# Altium PCB Sensor_LoRa_Flower_Watchdog.PCBDOC (part 2 of 2)
Units mil, origin at the board's own origin, x right, y up, seen from the top; angles counter-clockwise.
Board outline 1299.21 x 7913.39 mil, 2 copper layers (Top, Bot), stack 63.824 mil thick; 64 components, 53 nets, 204 pads, 152 vias.
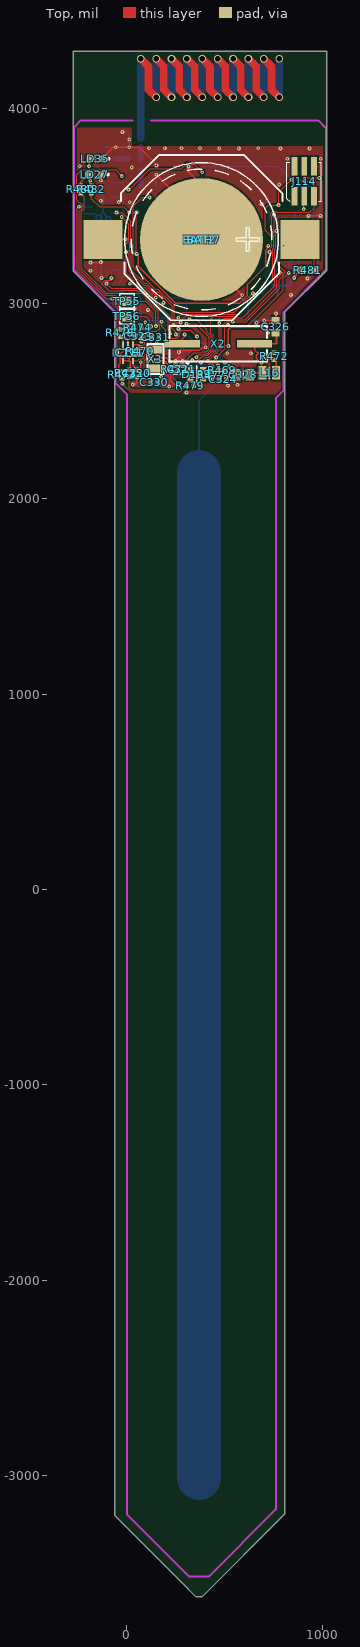
[diagram p0: Top view]

## Via types
v1: diameter 19.68, hole 7.87, Top to Bot, tented both sides, 133 vias
v2: diameter 39.37, hole 27.56, Top to Bot, tented both sides, 19 vias

## Nets (pads, with @x,y where several pads share a name; then routed paths per layer and width w, separated by ;. In a path a pad name is that pad's centre, name@x,y a point inside that pad or via, vN(x,y) a via of type N, cw(c..) or ccw(c..) an arc to the next point about the centre after c; other vN are vias at no path point) (continued)
P3V0: (continued)
  Bot w5: T40.2 -27.95,3545.28 -19.68,3553.54 ; R468.1 -26.57,3118.5 R467.1 -9.45,3138.19 0,3147.64 0,3198.82 R483.1@-20.08,3218.9 ; v1(-26.57,3442.01) -21.73,3442.01 -19.68,3439.96 -19.68,3553.54 ; R483.1 R483.1@-20.08,3218.9 ; v1(-5.47,3262.82) -8.44,3262.82 -20.08,3251.18 R483.1@-20.08,3218.9 ; v1(7.87,3582.68) 7.68,3582.87 R489.2 -19.68,3553.54 ; C322.2 231.46,2768.09 225.18,2768.09 218.9,2761.81 IC112.4 178.15,2761.81 171.87,2755.53 171.87,2684.89 167.48,2680.49 33.31,2680.49 28.92,2684.89 28.92,2701.77 27.93,2702.76 IC112.18 -16.73,2702.76 -46.26,2732.28 -46.26,2964.57 -156.5,3074.8 IC109.8 -156.5,3224.41 -147.64,3233.27 -34.45,3233.27 R483.1@-20.08,3218.9 ; IC113.13 v1(385.83,3671.26) 385.83,3692.01 C329.2 773.43,3700.79 v1(841.54,3632.68) ; R488.1@711.02,3136.03 711.02,3154.58 728.74,3172.3 IC114.8 728.74,3261.22 v1(730.32,3262.8) ; R488.1 711.14,3130.59 R466.2 ; R487.2 v1(776.57,3502.95) ; R476.1 862.99,3670.08 841.54,3648.62 v1(841.54,3632.68) ; TP53.1 873.82,3600.39 v1(841.54,3632.68)
  Bot w15: T39.2 770.08,3071.65 R466.2 828.74,3090.55 839.47,3101.28 839.47,3115.26 854.16,3129.95 v1(856.31,3129.95)
PROBE: D139.4 R469.2 | length 5863.3
  Top w7.87: D139.4 396.64,2662.4 431.09,2696.85 452.76,2696.85 v1(467.52,2682.09) R469.2@467.52,2652.56
  Bot w7.87: 369.09,2135.83 369.09,2502.77 460.83,2594.5 460.83,2601.9 467.52,2608.59 v1(467.52,2682.09)
  Bot w226.77: 369.09,-3011.81 369.09,2135.83
PROG_MISO: J114.1
RESETn: IC112.29 J114.5 R476.2 | length 1617.2
  Top w5: v1(274.52,2902.42) 266.45,2902.42 307.99,2943.96 571.83,2943.96 747.66,3119.79 747.66,3279.86 750.77,3282.97 750.77,3346.67 737.91,3359.53 737.91,3382.6 742.45,3387.14 742.45,3440.48 735.6,3447.33 735.6,3462.11 746.05,3472.57 760.83,3472.57 768.06,3465.33 935.81,3465.33 957.68,3487.2 J114.5 957.68,3604.33 939.11,3622.89 911.75,3622.89 v1(907.68,3626.97)
  Bot w5: IC112.29 105.19,2853.47 105.19,2889.23 117.66,2901.7 156.96,2901.7 169.98,2888.68 184.35,2888.68 194.51,2898.84 194.51,2903.58 205,2914.07 239.19,2914.07 250.85,2902.42 v1(274.52,2902.42) ; R476.2 887.99,3626.97 v1(907.68,3626.97)
SCL1: IC109.6 IC112.6 R468.2 | length 821.7
  Top w5: v1(-105.21,3101.4) -81.42,3077.6 52.9,3077.6 58.9,3071.6 87.18,3071.6 119.58,3039.2 119.58,3030.51 221.61,2928.48 221.61,2880.13 250.98,2850.76 v1(250.98,2841.32)
  Bot w5: IC109.6 -100.86,3168.77 -100.86,3116.96 R468.2@-85.29,3101.4 ; v1(-105.21,3101.4) R468.2@-85.29,3101.4 ; IC112.6 196.85,2723.89 258.41,2723.89 263.1,2728.58 263.1,2730.23 266.03,2733.16 273.14,2733.16 283.59,2743.62 283.59,2758.4 271.52,2770.47 269.69,2770.47 263.1,2777.06 263.1,2829.2 v1(250.98,2841.32) ; R468.2@-85.29,3101.4 -80.73,3101.4 R468.2@-85.27,3101.38
SDA1: IC109.5 IC112.3 R467.2 | length 755.2
  Top w5: 221.46,2854.51 211.61,2864.35 211.61,2924.34 109.58,3026.37 109.58,3035.06 83.04,3061.6 53.34,3061.6 48.34,3066.6 -16.54,3066.6 -18.23,3064.92 -93.1,3064.92 -112.24,3084.06 -112.4,3084.06 -122.56,3094.21 -122.56,3108.58 -112.4,3118.74 -89.95,3118.74 ; -89.95,3118.74 -80.08,3118.74 -78.74,3120.08 v1(-78.74,3129.95) -89.95,3118.74
  Bot w5: v1(-78.74,3129.95) -78.74,3172.24 IC109.5 -28.54,3173.23 R467.2 ; IC112.3 213.83,2781.5 222.44,2790.11 222.44,2843.53 v1(221.46,2844.51)
SENS_ENn: IC112.26 R466.1 T39.1 | length 824.9
  Top w5: v1(262.56,2926.61) 262.56,2929.17 288.36,2954.96 548.47,2954.96 v1(644.69,3051.18)
  Bot w5: IC112.26 51.18,2888.15 58.23,2895.2 60.32,2895.2 90.19,2925.07 251.34,2925.07 262.56,2936.29 v1(262.56,2926.61) ; v1(644.69,3051.18) 687.4,3051.18 T39.1 695.28,3071.65 R466.1
SENS_OUT: C323.2 IC112.25 R474.1 | length 137.3
  Top w5: v1(20.28,2845.11) 20.28,2847.1 17.69,2844.51 19.69,2842.52 31.3,2842.52 42.13,2831.69 57.07,2846.63 ; 57.07,2846.65 61.46,2851.05 61.46,2863.63 66.93,2869.09 R474.1@79.53,2869.09
  Bot w5: v1@14.79,2849.43 v1@15.79,2848.43 ; v1@15.79,2848.43 v1@18.7,2845.52 ; v1@15.79,2848.43 13.78,2848.43 17.69,2844.51 v1@18.7,2845.52 ; v1@18.7,2845.52 v1@19.28,2846.1 ; v1@18.7,2845.52 v1@19.11,2845.11 ; v1@19.11,2845.11 19.71,2844.51 23.62,2848.43 19.09,2852.95 19.09,2846.29 v1@19.28,2846.1 ; v1@19.11,2845.11 v1(20.28,2845.11) ; v1@19.28,2846.1 20.28,2847.1 v1(20.28,2845.11) ; v1@19.28,2846.1 v1(20.28,2845.11)
VCC: C319.2 C320.1 IC110.14 IC111.5 T39.3 | length 1281.5
  Top w5: IC111.5 52.44,2705.71 64.05,2717.32 84.21,2717.32 88.6,2721.72 88.6,2793.31 91.16,2795.87 91.16,2810.72 96.48,2816.03 96.48,2846.67 ; v1@90.36,2897.25 93.5,2900.39 v1(93.5,2903.57) ; v1@93.5,2897.25 93.5,2890.55 102.61,2881.44 102.61,2866.52 96.46,2860.36 96.46,2846.69 ; v1(177.17,2906.03) 177.17,2883.2 199.11,2861.25 199.11,2835.37 213.99,2820.49 254.69,2820.49 268.33,2834.13 268.33,2849.37 280.2,2861.24 327.81,2861.24 v1@355.71,2833.35
  Top w7.87: IC111.5 31.5,2685.04 37.4,2679.13 37.4,2672.24 C320.1 C320.1@51.81,2659.45 ; v1@355.71,2833.35 v1(359.33,2829.72) ; v1(519.09,2781.57) 519.09,2864.5 531.94,2877.34 682.46,2877.34 v1(688.78,2883.66)
  Bot w5: v1(93.5,2903.57) 102.14,2912.2 170.99,2912.2 v1(177.17,2906.03)
  Bot w7.87: v1(359.33,2829.72) 359.33,2826.1 368.03,2817.4 368.03,2808.31 381.94,2794.39 462.63,2794.39 475.45,2781.57 v1(519.09,2781.57) ; IC110.14 v1(688.78,2883.66) 698.15,2893.03 729.65,2893.03 C319.2 730.32,2950.39 T39.3
pads on no net: IC110.8 IC110.9 IC110.10 IC110.11 IC110.12 IC110.13 IC113.7 IC113.11 IC113.12 IC113.15 IC113.16

## Polygon pours and split planes (outlines as drawn)
GND on Top "Top-GND" (solid, remove dead copper, pour order 2): -63.98,2534.45 806.77,2534.45 806.77,2952.76 1023.62,3169.6 1023.62,3804.13 24.61,3804.13 24.61,3899.41 -273.82,3899.41 -275.59,3897.64 -273.76,3895.81 -273.76,3164.37 -63.98,2954.58
GND on Bot "Bot-GND" (solid, remove dead copper, pour order 0): 0,2534.45 0,-3198.82 319.88,-3518.7 418.31,-3518.7 762.8,-3174.21 762.8,2514.76 1023.62,2775.59 1023.62,3804.13 24.61,3804.13 24.61,3899.41 -275.59,3897.64 -275.59,2810.04

## Keep-outs
KeepOutLayer:
  lines w10: 29.53,3937.01 -236.22,3937.01 -270.67,3902.56 -270.67,3169.29 -59.06,2957.68 -59.06,2593.5 0,2534.45 0,-3198.82 24.61,-3223.43 319.88,-3518.7 418.31,-3518.7 762.8,-3174.21 762.8,2514.76 802.17,2554.13 802.17,2954.92 1018.7,3171.46 1018.7,3897.64 979.33,3937.01 123.03,3937.01

## Other copper
Bot:
  pour cut-out: 41.18,3767.87 100.55,3767.87 100.55,3662.4 99.57,3661.42 41.34,3661.42 41.34,3708.66 39.37,3710.63 39.21,3710.47 -64.8,3710.47 -64.8,3769.84 45.38,3769.84
  region: 244.02,2647.64

## Silkscreen, mask and mechanical layers (free items; w line width, h text height)
Mechanical1:
  the board outline again, w10
Mechanical2:
  lines w10: -39.37,-3172.39 787.4,-3172.39 ; -39.37,2952.76 776.57,2952.76 ; 369.09,-3622.05 369.09,2588.58

## Text inside footprints (layer, text, board x,y; h text height)
IC113: Mechanical 22 "RFM95_98W" at 169.29,3129.92 h62 r90; Mechanical 22 "IC" at 484.26,3129.92 h86.8 r90; BottomOverlay "8" at -28.54,2921.26 h60 r270; BottomOverlay "9" at -29.53,3658.46 h60 r270; BottomOverlay "16" at 680.12,3595.47 h60 r270